# Altium PCB 跃贵LP2601.PcbDoc
Units mm, origin at the board's own origin, x right, y up, seen from the top; angles counter-clockwise.
Board outline 152.4 x 101.6 mm, 2 copper layers (Top Layer, Bottom Layer); 32 components, 0 nets, 82 pads, 0 vias.
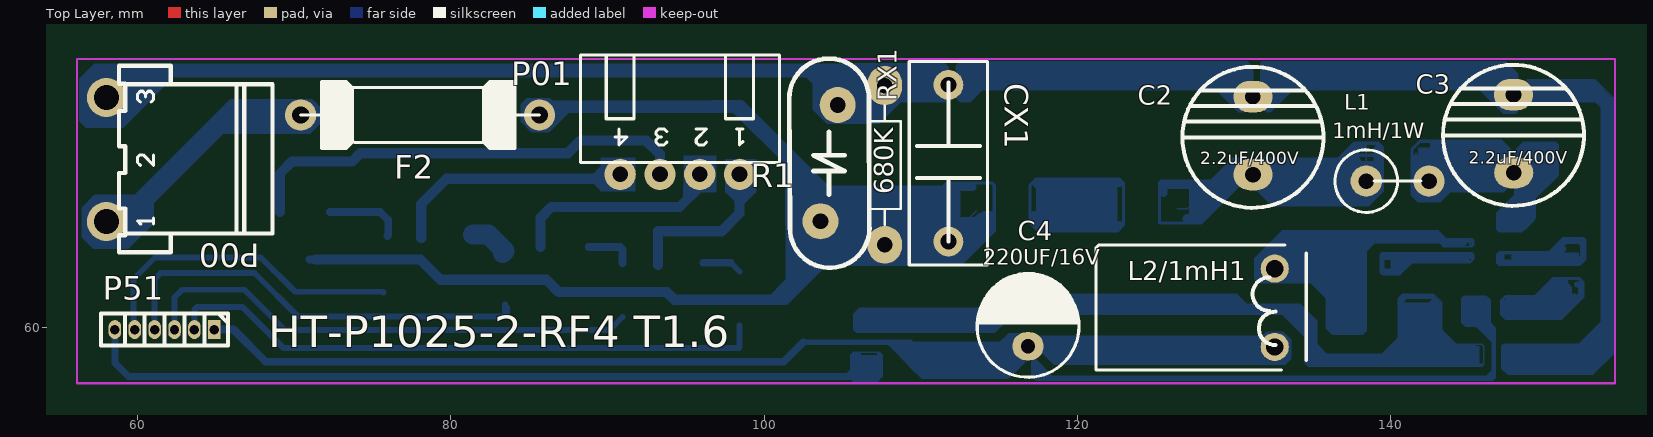
[diagram p0: Top Layer view]
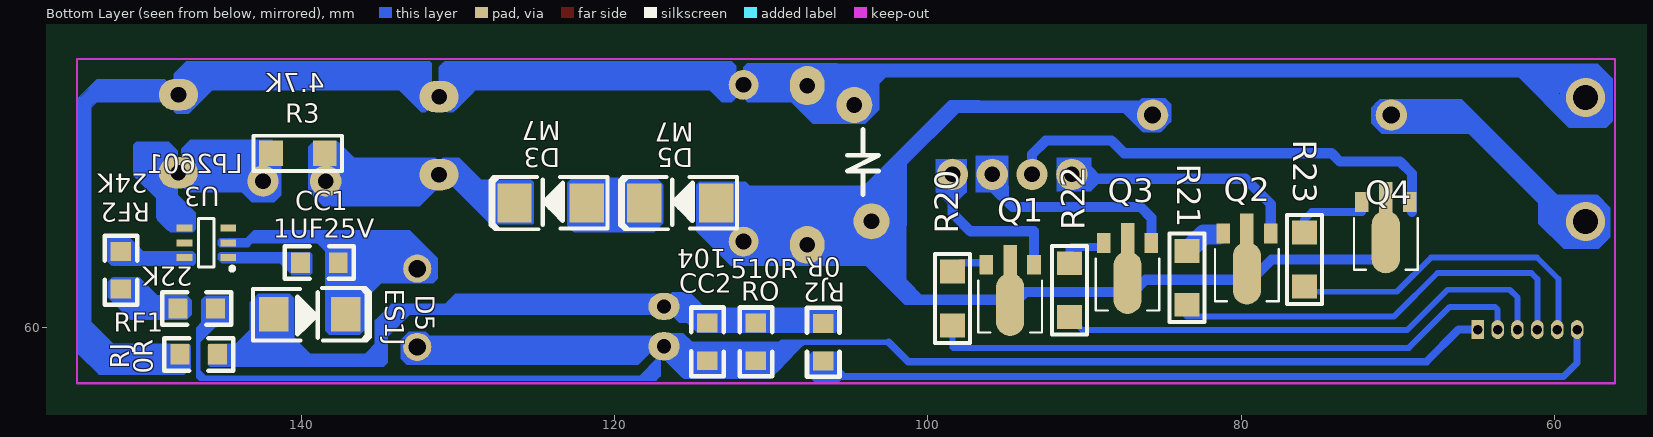
[diagram p1: Bottom Layer view, seen from below]

## Layer stack, top to bottom
Top Solder: solder mask 0.0102, Solder Resist, Dk 3.5
Top Layer: signal copper 0.0356
Dielectric 1: dielectric 0.32, FR-4, Dk 4.8
Bottom Layer: signal copper 0.0356
Bottom Solder: solder mask 0.0102, Solder Resist, Dk 3.5

## Board outline
25.4,25.4 177.8,25.4 177.8,127 25.4,127

## Design rules (kind name [scope] priority, off if disabled: settings)
Clearance [All] p1: gap=0.254 ignorepadtopadclearanceinfootprint=FALSE except(0: Arc-Hole Track-Hole SMDPad-Hole THPad-Hole Via-Hole Fill-Hole Poly-Hole Region-Hole Text-Hole)
PolygonConnect [All] p1: connectstyle=Relief reliefconductorwidth=0.254 reliefentries=4 polygonreliefangle="90 Angle" airgapwidth=0.254
RoutingVias [All] p1: holewidth=0.711 width=1.27 viastyle="Through Hole" minholewidth=0.711 minwidth=1.27 maxholewidth=0.711 maxwidth=1.27
SolderMaskExpansion [All] p1: expansion=0.102
Width [All] p1: maxlimit=0.254 minlimit=0.254 preferedwidth=0.254
30 further rules are at their usual default settings.

## Components (designator, comment, footprint, x,y, rotation, side; value= is the part's Value field where it differs from the comment)
C2 "2.2uF/400V" 4.7uF/400V大体 131.191,72.136 r180 top
C3 "2.2uF/400V" 4.7uF/400V大体 147.828,72.263 r180 top
C4 "220UF/16V" EC-220UF/16V/25V 116.84,60.071 r90 top
CC1 "1UF25V" R-0805 138.811,64.135 r0 bottom
CC2 "104" R-0805 114.071,59.055 r90 bottom
CX1 "" CX2-13*5-10 111.76,70.485 r90 top
D3 "M7" IN4007-SOP#1 124.079,67.945 r270 top
D5 "ES1J" IN4007-SOP#2 139.446,60.833 r90 top
D5 "M7" IN4007-SOP#1 115.81,67.945 r270 top
F2 "Fuse 1" FUSE15 78.029,73.558 r180 top
L1 "1mH/1W" RAD0.1 138.43,69.342 r90 top
L2/1mH1 "" 2.2MH/8*10 132.588,63.754 r270 top
P00 "220V~" VH-3AW 58.014,66.756 r90 top
P01 "风扇" XH-4AW 98.425,69.77 r180 top
P51 "Header 6" HDR1.27-M-LI-6P 61.722,59.864 r180 top
Q1 "HST97A8" SOT-89 93.218,64 r0 bottom
Q2 "HST97A8" SOT-89 78.105,66 r0 bottom
Q3 "HST97A8" SOT-89 85.725,65.4 r0 bottom
Q4 "HST97A8" SOT-89 69.24,68 r0 bottom
R1 "10D471" ZNR7.5 104.14,70.485 r270 top
R3 "Res2" "R 1206-HP_M" 140.208,71.12 r0 bottom
R20 "Res2" "R 1206-HP_M" 98.425,61.849 r90 bottom
R21 "Res2" "R 1206-HP_M" 83.439,63.166 r90 bottom
R22 "Res2" "R 1206-HP_M" 90.957,62.382 r90 bottom
R23 "Res2" "R 1206-HP_M" 75.946,64.338 r90 bottom
RF1 "0R" R-0805 146.558,58.293 r180 bottom
RF2 "24K" R-0805 151.511,63.627 r90 bottom
RJ "22K" R-0805 146.685,61.214 r180 bottom
RJ2 "0R" R-0805 106.68,59.03 r90 bottom
RO "510R" R-0805 110.973,59.055 r90 bottom
RX1 "680K" R10 107.696,65.278 r90 top
U3 "LP2601" SOT23-6L 146.05,65.405 r90 bottom

## Footprints (in the part's own frame and the unit in brackets; to place one, negate y for a bottom-side part, rotate by r counter-clockwise, add the part's x,y. Pads: shape width x height; smd on the part's side, far side on the other; paste and mask are expansions set on the pad)
2.2MH/8*10 [mm]
  round 1.8 hole 1.1: 1(0,0) 2(5,0)
  silkscreen extent -1.5,-11.4 6.48,2.01
4.7uF/400V大体 [mm]
  oval 2.5x2 hole 1: 1(-0.014,2.378) 2(-0.001,-2.595)
  silkscreen extent -4.5,-4.5 4.5,4.5
CX2-13*5-10 [mm]
  round 1.9 hole 1: 1(-5,0) 2(5,0)
  silkscreen extent -6.5,-2.5 6.5,2.5
EC-220UF/16V/25V [mm]
  oval 1.8x2 hole 0.9: 1(-1.27,0)
  oval 1.7x2 hole 0.9: 2(1.27,0)
  silkscreen extent -3.25,-3.25 3.25,3.25
FUSE15 [mm]
  round 2 hole 1.1: 1(7.62,0) 2(-7.62,0)
  silkscreen extent -7.62,-2.14 7.62,2.14
HDR1.27-M-LI-6P [mm] "直插，脚距：1.27mm                    @sucaita.com 素材塔"
  rect 0.8x1.2 hole 0.6: 1(-3.175,0)
  oval 0.8x1.2 hole 0.6: 2(-1.905,0) 3(-0.635,0) 4(0.635,0) 5(1.905,0) 6(3.175,0)
  silkscreen extent -4.06,-1.02 4.06,1.02, body extent -3.97,-0.9 3.98,0.9, height 4.5
IN4007-SOP#1 [mm]
  rect 2.5x2.2 smd far side: 1(0,-2.3) 2(0,2.3)
IN4007-SOP#2 [mm]
  rect 2.2x1.9 smd far side: 1(0,-2.3) 2(0,2.3)
R10 [mm]
  oval 2.4x2.2 hole 1: 1(0,0)
  oval 2.5x2.2 hole 1: 2(10.16,0)
  silkscreen extent 1.27,-1.02 8.89,1.02
"R 1206-HP_M" [mil] "1/4W高精度贴片电阻                    @sucaita.com 素材塔"
  rect 60x62.99 smd: 1(-67.5,0) 2(67.5,0)
  silkscreen extent -112,-44 112,44, body extent -63,-31 63,32, height 22
R-0805 [mm]
  rect 1.2x1.3 smd: 1(-1.175,0) 2(1.225,0)
  silkscreen extent -2.17,-1.05 2.22,1.03
RAD0.1 [mm]
  round 2 hole 1: 1(0,-4) 2(0,0)
  silkscreen extent -2,-3.5 2,2
SOT23-6L [mm] "3x1.6x1.1mm(长宽高)"
  rect 0.45x1 smd: "1 VCC"(-0.95,-1.397) "2  GND"(0,-1.397) "3 NC"(0.95,-1.397) "4 HV"(0.95,1.397) "6  FB"(-0.95,1.397) " 5 NC"(0,1.397)
  silkscreen extent -1.77,-1.78 1.55,0.51, body extent -1.5,-1.4 1.5,1.4, height 1.15
SOT-89 [mil]
  rect 34.02x50 smd: 1(0,0) 3(120,0)
  rect 34x100 smd: 2(60,0)
  oval 70.87x157.48 smd: 2(60,100)
  silkscreen extent -20,40 140,170, body extent -31,-17 151,151, height 63
VH-3AW [mm]
  round 2.5 hole 1.6: 1(0,0) 3(7.92,0)
  silkscreen extent -1.96,-10.6 9.96,-0.8
XH-4AW [mm]
  round 2 hole 1: 1(0,0) 2(2.54,0) 3(5.08,0) 4(7.62,0)
  silkscreen extent -2.54,-7.62 10.16,-0.76
ZNR7.5 [mm]
  round 2.3 hole 1: 1(-3.71,0.55) 2(3.71,-0.55)
  silkscreen extent -6.68,-2.54 6.68,2.58

## Part data
CX1: library part Cap, "Capacitor"
F2: "Fuse"
P00: library part "Header 2", "Header, 2-Pin"
P01: library part "Header 4", "Header, 4-Pin"
P51: "Header, 6-Pin"
Q1 Q2 Q3 Q4: library part Triac, "Silicon Bidirectional Triode Thyristor"
R1: library part "Res Varistor", "Varistor (Voltage-Sensitive Resistor)"
R3 R20 R21 R22 R23: "Resistor"

## Nets (pads, with @x,y where several pads share a name; then routed paths per layer and width w, separated by ;. In a path a pad name is that pad's centre, name@x,y a point inside that pad or via, vN(x,y) a via of type N, cw(c..) or ccw(c..) an arc to the next point about the centre after c; other vN are vias at no path point)
pads on no net: "U3.1 VCC" "U3.2  GND" "U3.3 NC" "U3.4 HV" "U3.6  FB" "U3. 5 NC" C2.1 C2.2 C3.1 C3.2 C4.1 C4.2 CC1.1 CC1.2 CC2.1 CC2.2 CX1.1 CX1.2 D3.1 D3.2 D5.1 D5.2 F2.1 F2.2 L1.1 L1.2 L2/1mH1.1 L2/1mH1.2 P00.1 P00.3 P01.1 P01.2 P01.3 P01.4 P51.1 P51.2 P51.3 P51.4 P51.5 P51.6 Q1.1 Q1.2 Q1.3 Q2.1 Q2.2 Q2.3 Q3.1 Q3.2 Q3.3 Q4.1 Q4.2 Q4.3 R1.1 R1.2 R3.1 R3.2 R20.1 R20.2 R21.1 R21.2 R22.1 R22.2 R23.1 R23.2 RF1.1 RF1.2 RF2.1 RF2.2 RJ2.1 RJ2.2 RJ.1 RJ.2 RO.1 RO.2 RX1.1 RX1.2
copper on no net: | length 1729
  Bottom Layer w0.1: 58.213,60.198 58.547,59.864 ; 102.235,76.454 103.124,75.565 103.124,73.914 104.013,73.025 107.315,73.025 108.712,74.422 111.506,74.422 111.76,74.676 111.76,76.581 111.506,76.835 105.791,76.835 ; 105.207,56.845 105.207,56.972 ; 105.397,57.061 105.486,56.972 105.258,56.972 ; 105.588,58.141 105.588,58.217 ; 105.664,56.871 105.664,56.566 ; 105.664,57.429 105.207,56.972 ; 105.664,57.988 105.664,58.369 105.842,58.191 105.842,58.217 105.994,58.369 106.02,58.369 ; 105.715,56.921 105.715,56.617 105.664,56.566 ; 105.715,57.277 105.512,57.277 ; 107.29,56.718 107.29,56.871 107.137,56.718 107.137,56.896 107.163,56.871 107.442,56.871 ; 107.391,58.318 107.34,58.268 ; 109.296,57.709 109.296,57.88 ; 110.871,60.071 111.125,59.817 114.605,59.817 116.078,61.29 116.078,61.697 115.341,60.96 112.014,60.96 ; 110.998,56.769 115.57,56.769 116.713,57.912 116.713,59.309 116.434,59.588 115.595,59.588 115.062,59.055 111.252,59.055 ; 111.481,59.055 109.296,59.055 109.296,57.531 110.058,56.769 112.039,56.769 ; 111.76,65.151 111.76,65.659 113.538,67.437 ; 111.887,58.166 115.697,58.166 115.824,58.293 ; 111.887,75.184 130.81,75.184 131.318,74.676 ; 116.713,62.103 129.921,62.103 130.175,62.103 130.81,61.468 134.239,61.468 135.255,60.452 ; 116.84,58.801 116.84,58.42 118.237,57.023 ; 116.84,61.214 117.221,60.833 132.842,60.833 ; 117.094,57.404 117.094,58.928 117.602,59.436 131.826,59.436 132.08,59.69 133.096,59.69 133.604,59.182 133.604,58.039 133.223,57.658 118.491,57.658 117.475,58.674 ; 117.094,58.547 117.094,56.896 117.348,56.642 146.177,56.642 146.533,56.998 146.533,59.284 146.304,59.512 146.304,60.833 146.05,61.087 ; 118.11,67.945 121.779,67.945 ; 118.491,58.293 132.461,58.293 ; 126.365,67.564 127,67.564 129.159,69.723 131.17,69.723 131.205,69.758 138.014,69.758 138.43,69.342 138.43,71.564 138.367,71.628 ; 129.413,60.833 133.096,60.833 134.493,59.436 134.493,57.785 ; 132.969,63.881 137.636,63.881 ; 134.493,57.912 134.62,57.912 134.747,57.785 134.493,57.785 ; 135.255,59.817 135.255,59.944 ; 135.255,60.325 135.128,60.325 135.255,60.198 ; 136.271,57.785 142.508,57.785 145.034,57.785 ; 137.146,60.833 137.89,61.577 137.89,63.627 137.636,63.881 ; 137.908,60.071 137.908,62.212 137.89,62.23 137.89,63.722 138.049,63.881 ; 139.909,64.516 139.97,64.455 144.653,64.455 ; 140.462,61.722 140.589,61.722 ; 140.716,61.976 140.843,62.103 ; 140.906,63.944 140.335,63.373 ; 141.605,71.12 141.605,70.358 142.621,69.342 ; 142.113,57.785 142.113,61.214 ; 142.24,69.723 147.066,69.723 147.193,69.596 ; 143.002,61.595 143.256,61.595 ; 143.256,61.341 143.256,61.595 ; 143.637,65.659 143.764,65.532 ; 144.082,65.596 143.954,65.596 143.891,65.659 ; 144.399,65.659 144.145,65.659 ; 144.551,61.824 144.755,61.824 144.653,61.722 144.653,61.697 144.653,61.976 ; 144.653,65.405 143.129,65.405 ; 144.729,60.274 144.653,60.198 ; 144.755,60.376 144.755,60.3 144.78,60.274 ; 144.755,61.874 144.653,61.976 ; 144.907,60.198 144.78,60.071 ; 144.907,61.976 146.05,61.976 146.304,61.722 146.304,60.198 146.177,60.071 144.78,60.071 ; 145.034,64.262 144.907,64.135 145.034,64.135 ; 145.097,65.215 145.288,65.405 145.161,65.405 145.288,65.532 ; 145.161,61.976 144.653,61.976 ; 145.161,64.516 145.161,64.262 145.034,64.135 ; 145.339,60.096 145.44,60.096 146.482,59.055 146.482,57.252 146.355,57.125 146.126,56.896 145.567,56.896 ; 145.517,56.693 145.644,56.82 146.609,56.82 146.609,59.969 146.304,60.274 146.304,61.062 ; 145.542,57.785 145.542,57.658 ; 145.567,60.249 145.567,60.325 145.567,60.173 146.558,59.182 146.609,59.182 ; 146.063,59.677 146.164,59.677 146.228,59.741 146.228,59.512 ; 146.813,74.858 152.853,74.858 153.416,74.295 153.416,60.071 ; 147.32,74.295 147.32,76.2 ; 147.447,57.277 147.447,57.023 ; 147.447,66.355 147.889,66.355 148.082,66.548 148.082,69.85 ; 147.647,74.676 147.829,74.858 ; 147.701,57.785 151.13,57.785 153.416,60.071 ; 147.701,64.516 151.638,64.516 ; 147.733,61.214 148.971,61.214 149.86,62.103 151.765,62.103 ; 148.336,74.858 148.772,74.422 153.035,74.422 153.416,74.041 153.416,60.325 ; 148.463,74.676 148.463,75.565 148.717,75.819 ; 148.971,75.565 148.717,75.565 ; 152.908,57.277 152.908,57.023 ; 105.207,56.972 105.258,56.972 ; 105.207,56.972 105.486,57.252 105.537,57.252 ; 105.207,56.972 105.512,57.277 ; 105.207,56.972 105.512,57.277 ; 105.258,56.972 105.385,57.099 105.689,57.099 105.677,57.112 105.397,57.112 105.512,56.998 105.537,56.998 105.537,57.252 ; 105.258,56.972 105.537,57.252 ; 105.512,57.277 105.537,57.252 ; 105.664,56.566 105.537,56.693 105.537,58.242 105.715,58.42 105.74,58.42 107.34,58.42 ; 105.664,56.566 107.213,56.566 ; 107.213,56.566 107.213,56.642 107.442,56.871 ; 107.213,56.566 107.518,56.871 ; 107.213,56.566 107.213,57.099 107.442,56.871 ; 107.213,56.566 107.518,56.871 ; 107.264,58.191 107.34,58.268 ; 107.264,58.191 107.264,58.344 ; 107.264,58.191 107.264,58.344 ; 107.264,58.344 107.34,58.42 ; 107.264,58.344 107.34,58.42 ; 107.34,58.268 107.34,58.242 107.442,58.141 107.442,58.318 107.34,58.42 ; 107.34,58.268 107.34,58.42 ; 107.34,58.42 107.518,58.242 107.518,56.871 ; 107.442,56.871 107.518,56.871 ; 134.493,57.785 134.747,57.531 145.796,57.531 ; 135.001,60.198 135.064,60.134 135.191,60.134 135.191,60.008 135.255,60.071 135.255,60.452 ; 135.001,60.198 135.255,60.452 ; 135.001,60.198 135.255,60.198 ; 135.001,60.198 135.255,60.198 ; 135.001,60.198 135.255,60.198 ; 135.001,60.198 135.255,59.944 ; 135.255,59.944 135.255,60.198 ; 135.255,59.944 135.128,60.071 135.255,60.198 ; 135.255,60.198 135.255,60.452 ; 135.255,60.198 135.255,60.452 ; 135.255,60.452 135.255,58.801 135.509,58.547 135.763,58.293 139.446,58.293 140.462,59.309 140.462,61.849 ; 137.636,63.881 137.636,65.246 138.303,65.913 142.621,65.913 143.129,65.405 ; 139.319,63.5 139.446,63.373 ; 139.319,63.5 139.446,63.5 ; 139.319,63.5 139.446,63.373 ; 139.319,63.5 139.319,64.643 ; 139.319,64.643 139.446,64.643 ; 139.319,64.643 139.446,64.516 ; 139.319,64.643 139.446,64.77 ; 139.319,64.643 139.446,64.516 ; 139.319,64.643 139.446,64.77 ; 139.446,63.373 139.446,63.5 ; 139.446,63.373 140.081,63.373 140.335,63.627 140.335,63.373 ; 139.446,63.373 139.827,63.373 ; 139.446,63.5 139.573,63.627 139.827,63.373 ; 139.446,64.516 139.573,64.516 ; 139.446,64.516 139.573,64.516 ; 139.446,64.643 139.573,64.516 ; 139.446,64.643 139.446,64.77 ; 139.446,64.77 145.161,64.77 145.288,64.643 145.288,64.389 145.034,64.135 ; 139.827,63.373 140.335,63.373 ; 139.827,63.373 140.589,63.373 ; 140.335,63.373 140.589,63.627 140.589,63.5 140.589,63.373 ; 140.462,61.595 140.589,61.722 ; 140.462,61.595 140.589,61.595 140.589,61.722 ; 140.462,61.595 140.462,61.849 ; 140.462,61.595 140.716,61.849 ; 140.462,61.849 140.589,61.722 ; 140.462,61.849 140.716,61.849 ; 140.462,61.849 140.716,62.103 ; 140.589,63.373 141.351,64.135 145.034,64.135 ; 140.716,61.849 140.843,61.976 140.843,62.103 ; 140.716,61.849 140.843,61.849 140.97,61.976 140.843,62.103 ; 140.716,61.849 140.716,62.103 ; 140.716,62.103 140.843,62.103 ; 140.716,62.103 142.748,62.103 143.256,61.595 ; 143.129,65.405 143.256,65.405 143.383,65.278 ; 143.129,65.405 143.51,65.405 143.383,65.278 ; 143.129,65.405 143.383,65.151 ; 143.129,65.405 143.129,65.532 ; 143.129,65.405 143.129,65.532 ; 143.129,65.405 143.002,65.405 143.129,65.532 ; 143.129,65.405 143.383,65.151 ; 143.129,65.405 138.938,65.405 138.43,64.897 138.43,59.817 138.176,59.563 136.271,59.563 135.89,59.944 135.89,61.849 134.874,62.865 131.572,62.865 131.318,63.119 131.318,64.389 133.096,66.167 143.002,66.167 143.51,65.659 ; 143.256,61.595 143.256,59.817 144.145,58.928 145.796,58.928 145.923,58.801 145.923,57.658 ; 143.383,65.151 143.637,65.151 143.891,65.405 ; 143.383,65.151 143.383,65.215 143.383,65.278 ; 143.383,65.151 143.383,65.278 ; 143.383,65.151 145.161,65.151 ; 143.51,65.659 143.637,65.532 143.764,65.532 ; 143.51,65.659 143.764,65.659 ; 143.51,65.659 144.653,65.659 145.161,65.659 145.288,65.532 ; 143.764,65.532 143.891,65.659 ; 143.764,65.532 143.764,65.659 ; 143.764,65.532 143.764,65.659 ; 143.764,65.532 143.764,65.659 ; 143.764,65.532 143.891,65.405 ; 143.891,65.405 144.145,65.659 ; 143.891,65.405 143.891,65.659 ; 143.891,65.405 144.145,65.659 ; 143.891,65.659 144.018,65.532 144.145,65.659 ; 144.526,60.325 144.729,60.325 144.653,60.249 144.653,60.198 ; 144.526,60.325 144.653,60.198 ; 144.526,60.325 144.526,61.849 144.653,61.976 ; 144.526,60.325 144.78,60.071 ; 144.653,60.198 144.755,60.198 144.78,60.173 144.78,60.274 ; 144.78,60.071 144.78,60.274 ; 144.78,60.071 144.78,60.274 ; 145.034,65.532 145.288,65.532 ; 145.034,65.532 145.034,65.278 145.161,65.151 ; 145.034,65.532 145.288,65.278 ; 145.161,65.151 145.288,65.278 ; 145.161,65.151 145.288,65.278 ; 145.288,65.278 145.288,65.532 ; 145.288,65.278 145.288,65.532 ; 145.288,65.278 145.288,65.532 ; 145.542,57.658 145.669,57.531 145.669,57.594 145.732,57.531 145.732,57.594 ; 145.542,57.658 145.923,57.658 ; 145.542,57.658 145.923,57.658 ; 145.732,57.594 145.796,57.658 145.923,57.658 ; 145.732,57.594 145.796,57.531 ; 145.796,57.531 145.923,57.658 ; 145.796,57.531 145.923,57.658 ; 147.447,57.023 147.574,57.023 147.574,57.15 ; 147.447,57.023 147.574,57.15 ; 147.447,57.023 147.701,57.277 147.828,57.277 147.701,57.15 147.701,57.023 147.574,57.15 ; 147.447,57.023 147.066,57.404 147.066,58.801 147.193,58.928 152.019,58.928 153.416,60.325 ; 147.447,57.023 152.908,57.023 ; 148.717,75.565 148.844,75.692 ; 148.717,75.565 148.717,75.819 ; 148.717,75.565 148.59,75.692 149.098,75.692 148.844,75.692 ; 148.717,75.819 148.844,75.692 ; 148.717,75.819 153.035,75.819 154.178,74.676 154.178,58.293 152.908,57.023 ; 153.416,60.071 153.416,60.325 ; 112.268,74.676 112.522,74.422 113.157,74.422 113.919,75.184 128.905,75.184 130.302,73.787 130.683,73.787 131.191,74.295 131.191,76.581 130.81,76.962 112.522,76.962 112.268,76.708 112.268,74.676 ; 131.699,74.168 132.08,73.787 132.334,73.787 133.731,75.184 145.669,75.184 147.193,73.66 147.955,73.66 148.082,73.787 148.082,76.2 147.32,76.962 131.826,76.962 131.699,76.835 131.699,74.168
  Bottom Layer w0.2: 57.836,68.275 59.741,68.275 65.938,74.473 71.12,74.473 71.603,73.99 71.603,73.05 70.993,72.441 65.43,72.441 60.935,67.945 60.935,66.65 59.385,65.1 57.201,65.1 56.515,65.786 56.515,67.615 57.302,68.402 59.919,68.402 ; 68.199,76.733 57.252,76.733 56.363,75.844 56.363,73.203 56.744,72.822 59.03,72.822 62.255,76.048 103.048,76.048 103.454,76.454 ; 100.101,61.544 101.448,61.544 104.521,64.618 104.521,65.176 ; 100.529,61.769 100.529,62.074 101.473,63.017 101.473,68.021 101.93,68.478 ; 100.863,62.103 101.854,62.103 103.759,64.008 112.522,64.008 114.681,66.167 114.681,69.088 114.554,69.215 111.633,69.215 111.379,68.961 104.013,68.961 102.362,68.961 ; 105.766,60.147 105.766,60.833 106.121,61.189 114.249,61.189 115.24,62.179 116.256,62.179 116.535,61.9 116.535,61.112 115.799,60.376 115.316,60.376 114.681,59.741 105.893,59.741 105.766,59.868 105.766,60.376 105.842,60.452 ; 118.237,69.469 122.682,69.469 122.936,69.215 122.936,66.548 122.555,66.167 117.475,66.167 116.967,66.675 116.967,69.088 117.348,69.469 118.872,69.469 ; 130.048,60.96 131.445,60.96 ; 136.652,70.739 137.668,71.755 139.192,71.755 139.446,71.501 139.446,69.215 ; 142.113,71.882 147.066,71.882 147.574,71.374 147.574,69.088 147.193,68.707 143.764,68.707 143.129,68.072 141.732,68.072 141.351,68.453 141.351,71.374 141.859,71.882 142.494,71.882 ; 145.288,57.658 145.415,57.658 145.542,57.785 ; 145.44,60.096 145.567,60.096 146.482,59.182 146.558,59.182 ; 145.517,56.693 146.482,56.693 146.609,56.82 146.609,59.614 146.533,59.69 ; 145.567,60.325 145.567,60.223 146.609,59.182 146.609,59.969 146.304,60.274 146.304,61.722 146.152,61.874 144.831,61.874 144.653,61.697 144.653,60.477 144.932,60.198 146.304,60.198 ; 146.533,57.252 146.05,56.769 145.796,56.769 146.304,56.769 ; 147.32,64.77 150.114,64.77 151.003,65.659 152.273,65.659 152.4,65.532 152.4,64.389 152.019,64.008 146.939,64.008 146.812,64.135 146.812,64.643 146.939,64.77 147.701,64.77 ; 147.447,61.976 149.225,61.976 150.368,63.119 152.019,63.119 152.273,62.865 152.273,61.976 150.876,60.579 147.32,60.579 147.066,60.833 147.066,61.722 147.32,61.976 147.701,61.976 ; 147.701,68.199 148.082,68.58 ; 149.225,75.692 149.098,75.692 148.971,75.565 ; 146.304,56.769 146.533,56.998 146.304,56.769 ; 148.971,75.565 148.717,75.565 148.971,75.565 ; 125.222,66.675 125.222,69.215 125.349,69.342 126.111,69.342 128.524,69.342 129.921,70.739 130.937,70.739 131.064,70.612 131.064,69.85 127.889,66.675 125.222,66.675 ; 131.445,68.834 132.461,67.818 138.557,67.818 139.446,68.707 139.446,70.612 139.065,70.993 137.668,70.993 137.414,70.739 131.445,70.739 131.445,68.834 ; 146.812,66.294 146.812,67.31 147.828,68.326 147.955,68.326 147.955,71.247 148.463,71.755 150.495,71.755 150.622,71.628 150.622,69.723 149.098,68.199 149.098,66.929 148.336,66.167 146.939,66.167 146.812,66.294
  Bottom Layer w0.3: 108.001,59.055 108.001,58.979 109.474,57.506 109.525,57.506 ; 108.179,59.055 108.229,59.055 109.347,57.937 ; 109.22,58.75 109.22,58.242 109.322,58.141 108.636,58.826 108.534,58.826 108.61,58.75 109.931,58.75 ; 109.525,57.963 109.525,57.506 ; 109.779,57.76 109.855,57.683 109.855,57.353 ; 110.312,56.921 110.109,56.921 109.525,57.506 ; 110.998,60.579 110.998,60.198 111.125,60.071 ; 114.071,59.969 114.351,59.969 ; 114.275,60.223 114.63,60.579 114.63,60.884 114.427,60.681 114.427,60.642 ; 114.96,56.896 115.57,56.896 116.586,57.912 116.586,58.268 ; 115.392,57.048 115.849,57.506 115.951,57.506 ; 115.519,59.08 115.24,59.08 115.011,58.852 115.646,59.487 116.002,59.487 ; 117.094,58.039 118.364,56.769 117.983,56.769 ; 117.348,57.785 117.221,57.658 117.221,57.531 ; 117.475,57.277 117.475,57.023 117.729,56.769 117.729,57.023 117.221,57.531 ; 117.729,58.674 117.856,58.674 ; 117.983,58.42 118.491,57.912 118.745,57.912 ; 117.983,58.547 117.856,58.674 ; 118.999,57.785 118.618,57.785 117.856,58.547 117.856,58.674 ; 131.699,59.182 131.826,59.182 132.207,59.563 133.096,59.563 133.477,59.182 133.477,58.166 133.223,57.912 ; 132.08,62.992 131.699,62.992 131.445,63.246 131.445,64.262 133.223,66.04 133.858,66.04 ; 132.334,64.516 132.334,64.77 133.35,65.786 ; 132.461,57.912 133.223,57.912 ; 133.223,57.785 133.223,57.912 ; 134.747,58.166 134.747,57.912 ; 134.747,63.246 136.017,61.976 136.017,60.071 136.398,59.69 138.049,59.69 138.303,59.944 ; 135.001,58.801 135.001,58.674 135.89,57.785 ; 135.001,59.055 135.89,58.166 136.271,58.166 ; 135.255,57.658 134.874,57.658 134.747,57.785 134.747,57.912 ; 135.89,62.738 136.017,62.865 136.017,63.119 136.144,62.992 136.144,62.484 135.636,62.992 135.255,62.992 136.144,62.103 136.525,62.103 ; 136.271,57.785 136.144,57.658 135.001,57.658 134.747,57.912 ; 140.081,64.516 139.573,64.516 139.446,64.389 139.446,63.754 139.573,63.627 140.589,63.627 141.224,64.262 141.224,64.389 ; 140.843,61.087 140.716,61.214 140.716,61.849 140.843,61.849 140.97,61.976 142.621,61.976 143.002,61.595 143.002,61.468 142.875,61.595 142.621,61.595 ; 143.256,65.659 143.51,65.405 144.272,65.405 ; 144.907,64.516 145.034,64.516 145.161,64.643 145.161,64.516 ; 144.907,65.532 145.034,65.532 ; 147.828,57.277 147.447,57.277 147.193,57.531 147.193,58.674 148.082,58.674 ; 152.019,58.547 152.019,58.674 153.67,60.325 153.797,60.325 ; 152.654,59.309 153.035,59.309 ; 152.781,75.692 152.908,75.692 154.051,74.549 154.051,74.422 153.924,74.422 153.035,75.311 ; 152.908,75.184 152.908,75.057 153.543,74.422 ; 153.134,74.577 153.543,74.168 153.67,74.168 ; 153.416,58.293 153.924,58.293 ; 153.543,59.436 153.416,59.309 153.035,59.309 ; 153.543,59.817 153.035,59.309 ; 154.051,58.42 152.908,57.277 ; 111.125,60.071 111.227,59.969 112.116,59.969 112.014,60.071 111.125,60.071 ; 117.221,57.531 117.221,57.023 117.475,56.769 117.983,56.769 ; 117.221,57.531 117.983,56.769 ; 152.908,57.277 152.527,57.277 152.908,57.277
  Bottom Layer w0.35: 118.364,56.769 145.796,56.769
  Bottom Layer w0.354: 86.487,73.279 87.274,74.066 ; 86.868,74.193 86.538,74.193 86.258,74.473 84.912,74.473 84.633,74.193 84.633,73.203 85.217,72.619 86.182,72.619 87.681,74.117 87.732,74.117 ; 88.697,69.52 89.027,69.52 ; 89.662,68.859 89.027,69.494 89.027,69.52 ; 89.662,70.155 89.027,69.52 ; 94.996,68.275 94.996,68.986 95.148,69.139 ; 97.853,64.135 98.425,63.563 ; 98.425,58.75 98.425,59.991 ; 98.501,68.047 98.654,68.047 99.314,68.707 99.314,68.885 ; 98.577,67.793 98.577,67.818 98.095,68.301 ; 98.628,68.834 98.933,68.529 98.933,68.478 ; 98.73,68.377 98.781,68.377 ; 102.641,59.055 104.419,59.055 109.296,59.055 110.947,57.404 111.074,57.404 ; 106.477,56.871 107.188,57.582 107.188,57.931 ; 107.188,60.331 111.652,60.331 111.887,60.566 ; 98.095,68.301 97.688,68.707 97.688,68.783 97.79,68.783 98.273,68.301 98.095,68.301
  Bottom Layer w0.38: 59.817,59.864 59.741,59.94 59.741,63.094 61.112,64.465 67.869,64.465 70.053,62.281 75.641,62.281 75.692,62.23 ; 61.087,59.864 61.087,62.56 61.087,63.094 61.468,63.475 67.462,63.475 70.231,60.706 73.838,60.706 83.439,60.706 83.566,60.833 83.566,61.265 ; 62.357,59.864 62.357,61.925 62.84,62.408 66.827,62.408 69.393,59.842 90.132,59.842 90.957,60.668 ; 63.627,59.864 63.627,61.138 63.805,61.316 66.675,61.316 69.291,58.699 98.374,58.699 98.425,58.75 98.425,60.134 ; 90.805,65.126 90.957,64.973 ; 102.489,59.055 102.641,59.055
  Bottom Layer w0.381: 61.087,59.864 61.087,61.769 ; 62.357,59.864 62.357,61.515 ; 63.627,59.864 63.627,60.639 ; 83.439,60.706 83.439,61.452
  Bottom Layer w0.4: 56.718,66.167 56.718,65.964 57.074,65.608 ; 56.82,66.751 56.82,67.615 57.429,68.224 57.531,68.224 ; 57.175,67.742 57.175,67.818 ; 57.201,65.38 57.201,66.04 ; 59.004,65.354 59.411,65.354 60.757,66.7 60.757,66.929 ; 59.004,67.361 60.046,67.361 65.405,72.72 66.65,72.72 ; 59.233,65.557 60.477,66.802 60.528,66.802 ; 59.842,67.97 59.842,68.123 65.938,74.219 66.294,74.219 ; 65.049,72.898 65.049,72.923 65.964,73.838 ; 65.583,72.898 65.659,72.974 65.659,73.508 66.065,73.101 66.065,72.949 ; 70.307,74.27 71.196,74.27 71.501,73.965 71.501,73.453 71.501,73.152 70.993,72.644 70.993,72.593 ; 102.21,66.065 102.21,69.19 102.235,69.215 ; 106.045,59.944 105.994,59.995 105.994,60.782 106.197,60.985 106.858,60.985 ; 114.427,60.681 114.427,61.036 115.291,61.9 116.205,61.9 116.205,60.935 115.913,60.642 115.252,60.642 114.681,60.071 114.529,60.071 114.529,60.223 114.96,60.655 ; 133.096,61.087 134.62,59.563 ; 133.604,60.833 133.858,60.833 134.747,59.944 135.001,59.944 135.001,60.452 134.239,61.214 133.604,61.214 ; 133.985,60.96 134.239,60.96 135.001,60.198 ; 137.795,64.643 137.922,64.643 138.811,65.532 ; 139.573,64.516 140.208,64.516 ; 142.621,65.913 143.002,65.913 143.51,65.405 ; 144.272,65.405 143.51,65.405 ; 144.653,65.405 143.891,65.405 143.51,65.405 ; 147.066,64.516 147.066,64.262 147.193,64.135 148.336,64.135 ; 147.193,61.595 147.193,60.96 147.32,60.833 147.701,60.833 ; 149.098,61.722 149.225,61.722 150.368,62.865 151.13,62.865 ; 149.86,61.849 149.86,62.103 150.368,62.611 151.257,62.611 ; 150.241,64.516 150.241,64.643 151.13,65.532 152.019,65.532 152.273,65.278 152.273,64.516 151.892,64.135 ; 150.749,64.516 150.749,64.77 151.003,65.024 ; 151.003,61.341 150.749,61.087 150.749,60.833 150.876,60.833 152.146,62.103 152.146,62.611 152.019,62.738 151.892,62.738 ; 151.638,61.722 151.638,61.976 ; 143.256,65.659 143.002,65.659 143.256,65.659 ; 143.256,65.659 143.51,65.405
  Bottom Layer w0.45: 58.547,59.864 58.547,57.734 59.411,56.871 106.477,56.871
  Bottom Layer w0.5: 56.591,74.244 56.591,73.355 56.871,73.076 ; 57.404,76.073 56.972,75.641 56.591,75.641 56.591,75.768 57.277,76.454 60.935,76.454 ; 57.531,68.224 59.385,68.224 ; 58.268,74.676 58.598,74.676 60.376,76.454 67.335,76.454 ; 58.649,73.127 58.852,73.127 62.128,76.403 62.382,76.403 ; 58.826,66.904 59.055,66.904 65.049,72.898 70.946,72.898 71.247,73.199 ; 59.182,74.371 59.487,74.371 61.468,76.352 61.798,76.352 ; 65.561,59.864 64.897,59.864 66.12,59.864 68.174,57.81 101.244,57.81 102.489,59.055 ; 70.968,64.334 71.124,64.334 ; 72.288,67.361 75.489,67.361 75.997,66.853 75.997,65.884 75.946,65.833 ; 88.798,65.126 90.805,65.126 ; 90.957,64.097 90.957,64.973 ; 96.114,64.135 97.853,64.135 ; 101.981,69.723 102.108,69.723 103.378,68.453 ; 102.235,62.738 102.235,62.865 103.632,64.262 ; 102.235,69.215 102.87,68.58 102.997,68.58 ; 102.362,63.5 102.997,64.135 ; 102.362,64.008 102.552,63.817 102.679,63.817 ; 102.743,76.454 102.743,76.327 103.378,75.692 103.378,74.041 104.14,73.279 107.188,73.279 108.712,74.803 108.839,74.676 111.379,74.676 111.506,74.803 111.506,76.454 ; 104.14,76.454 104.267,76.581 111.379,76.581 111.506,76.454 ; 111.506,75.946 111.506,76.454 ; 111.633,64.262 112.522,64.262 114.427,66.167 114.427,67.183 ; 111.76,68.961 113.284,68.961 ; 112.268,64.643 112.395,64.643 113.157,65.405 ; 112.649,75.057 113.157,75.057 ; 113.411,76.708 112.649,76.708 112.522,76.581 112.522,74.676 113.03,74.676 113.792,75.438 113.919,75.438 ; 113.792,67.056 113.665,66.929 113.665,65.913 114.046,66.294 114.046,67.183 ; 117.221,67.183 117.221,66.675 117.475,66.421 ; 117.348,69.215 117.729,68.834 ; 122.047,66.421 122.555,66.421 122.682,66.548 ; 122.174,69.215 122.682,69.215 ; 125.476,68.58 125.476,69.088 128.524,69.088 128.651,69.215 ; 129.159,75.946 129.159,75.184 130.302,74.041 130.683,74.041 130.937,74.295 130.937,76.581 130.81,76.708 130.683,76.708 ; 129.54,75.184 129.667,75.184 130.556,74.295 ; 129.794,61.849 130.048,61.849 130.683,61.214 131.318,61.214 130.048,61.214 129.921,61.087 ; 132.461,75.438 132.334,75.311 132.334,74.422 132.334,74.676 132.969,75.311 ; 132.715,76.708 131.953,76.708 131.953,74.168 132.08,74.041 132.207,74.041 133.604,75.438 ; 139.446,57.912 140.97,59.436 ; 142.875,59.817 143.002,59.817 144.399,58.42 144.399,58.293 ; 143.637,58.801 143.002,59.436 143.002,58.928 143.256,58.674 145.288,58.674 ; 145.669,75.565 147.32,73.914 147.828,73.914 147.828,76.073 147.193,76.708 147.066,76.708 ; 146.05,75.438 146.233,75.438 146.813,74.858 ; 147.511,76.391 147.574,76.327 147.574,73.914
  Bottom Layer w0.6: 127,66.929 127.762,66.929 130.302,69.469 130.302,69.723 ; 128.016,68.961 128.905,68.961 130.302,70.358 130.683,70.358 129.921,70.358 128.524,68.961 128.46,68.961 ; 128.905,68.58 129.921,69.596 ; 132.842,68.199 132.461,68.199 131.445,69.215 131.445,70.104 131.826,70.485 134.112,70.485 136.906,70.485 137.922,71.501 138.176,71.501 ; 137.668,70.993 137.668,70.739 137.795,70.612 ; 137.795,68.199 138.557,68.199 139.192,68.834 139.192,71.374 ; 141.605,70.739 141.605,68.707 141.859,68.453 143.129,68.453 143.637,68.961 147.066,68.961 147.193,69.088 ; 146.431,71.628 146.939,71.628 147.32,71.247 147.32,69.723 147.193,69.596 ; 147.889,66.355 147.005,66.355 147.005,67.122 148.717,68.834 148.717,68.961 ; 148.209,66.421 148.336,66.421 148.971,67.056 148.971,68.453 150.368,69.85 150.368,70.104 ; 148.336,68.453 148.336,69.342 148.209,69.469 148.209,71.12 148.59,71.501 150.368,71.501 ; 148.59,67.945 148.59,68.58
  Bottom Layer w0.65: 69.088,67.361 69.088,69.825 69.85,70.587 73.685,70.587 74.219,71.12 87.456,71.12 88.265,71.929 92.474,71.929 93.345,71.058 93.345,69.77 ; 71.374,64.338 74.32,64.338 78.038,64.338 79.333,63.043 86.106,63.043 86.893,62.255 93.786,62.255 94.272,61.769 100.529,61.769 100.863,62.103 ; 78.105,65.706 78.105,67.883 79.716,69.494 88.992,69.494 90.424,69.494 ; 85.725,65.151 85.725,67.005 86.411,67.691 92.631,67.691 94.59,67.691 95.885,68.986 95.885,69.77 ; 93.218,64 93.218,66.142 97.282,66.142 98.425,67.285 98.425,69.77 ; 96.774,74.193 98.501,74.193 104.902,67.793 104.902,67.64 ; 102.21,70.002 103.378,68.834 103.378,68.453
  Bottom Layer w0.8: 66.802,76.454 106.125,76.454 ; 86.487,74.088 98.189,74.088 101.727,70.55 101.727,66.595
  Bottom Layer w1: 101.473,62.23 101.219,61.976 101.219,62.23 102.006,63.017 102.006,66.954
  Bottom Layer w1.27: 81.407,65.938 82.381,65.938 83.439,64.881 83.312,64.754 ; 90.805,69.572 90.805,69.77 ; 104.14,65.579 110.019,65.579

## Keep-outs
Keep-Out Layer:
  lines w0.152: 56.134,56.435 154.305,56.435 154.305,77.136 56.134,77.136 56.134,56.435

## Other copper
Bottom Layer:
  rectangle: 105.537,58.141 105.664,58.242
  rectangle: 105.664,58.141 106.172,58.42
  rectangle: 105.689,56.566 107.213,57.099
  rectangle: 105.537,56.871 107.518,58.242
  rectangle: 109.322,57.531 110.566,58.141
  rectangle: 110.058,56.769 110.998,57.175
  rectangle: 109.779,56.972 110.693,57.76
  rectangle: 109.296,57.531 110.973,57.88
  rectangle: 109.296,57.937 110.947,59.004
  rectangle: 114.757,60.477 116.002,61.747
  rectangle: 106.121,59.741 114.681,61.189
  rectangle: 89.56,68.682 91.77,70.841
  rectangle: 94.844,68.605 96.952,70.968
  rectangle: 97.511,68.631 99.492,70.764
  rectangle: 57.302,67.183 60.909,68.402
  rectangle: 57.201,65.1 59.385,66.04
  rectangle: 56.515,65.786 60.122,66.65
  rectangle: 56.515,66.65 60.935,67.615
  rectangle: 65.938,72.441 70.993,74.473
  rectangle: 60.757,76.124 67.081,76.733
  rectangle: 56.718,72.822 59.03,73.66
  rectangle: 56.363,73.381 59.639,75.844
  rectangle: 57.125,74.955 61.189,76.606
  rectangle: 114.427,60.642 115.252,61.366
  rectangle: 115.595,59.055 116.611,59.588
  rectangle: 115.392,57.15 115.951,57.506
  rectangle: 115.392,57.506 116.383,58.115
  rectangle: 115.443,57.912 116.713,59.411
  rectangle: 110.617,56.769 115.57,59.055
  rectangle: 146.177,59.69 146.533,60.071
  rectangle: 146.177,59.36 146.609,59.842
  rectangle: 145.796,59.715 146.38,60.198
  rectangle: 144.526,60.274 146.304,61.849
  rectangle: 118.237,57.912 118.745,58.293
  rectangle: 117.475,59.055 118.745,59.436
  rectangle: 117.983,58.166 118.745,58.547
  rectangle: 117.729,58.42 118.999,59.182
  rectangle: 135.001,57.658 135.89,58.293
  rectangle: 131.064,60.833 134.239,61.468
  rectangle: 134.493,57.785 135.255,59.944
  rectangle: 135.763,57.531 140.272,58.293
  rectangle: 139.954,57.531 145.669,58.801
  rectangle: 140.462,57.531 143.256,61.595
  rectangle: 118.618,57.658 133.223,59.436
  rectangle: 117.348,60.833 130.175,62.103
  rectangle: 152.4,57.785 153.67,59.309
  rectangle: 147.701,57.023 152.908,57.785
  rectangle: 147.193,57.404 153.289,58.928
  rectangle: 153.416,58.293 154.178,74.549
  rectangle: 148.717,74.422 153.035,75.819
  rectangle: 132.461,64.77 133.731,65.405
  rectangle: 131.572,63.119 132.334,64.516
  rectangle: 139.319,63.5 139.446,63.627
  rectangle: 139.446,63.373 140.589,63.627
  rectangle: 143.383,65.151 144.272,65.405
  rectangle: 131.826,62.865 133.35,64.897
  rectangle: 136.017,59.817 138.43,63.373
  rectangle: 133.096,62.865 138.43,66.167
  rectangle: 138.176,65.405 143.002,66.167
  rectangle: 139.97,63.754 140.97,64.455
  rectangle: 140.081,64.135 145.034,64.77
  rectangle: 147.701,64.008 152.019,64.77
  rectangle: 149.86,61.277 151.575,62.611
  rectangle: 147.32,60.579 150.876,61.976
  rectangle: 147.447,66.802 148.971,68.072
  rectangle: 148.717,68.961 149.86,70.358
  rectangle: 148.209,68.199 149.098,70.358
  rectangle: 146.939,66.167 148.336,67.437
  rectangle: 148.336,69.723 150.622,71.628
  rectangle: 141.605,68.389 143.446,70.612
  rectangle: 142.494,71.12 147.066,71.882
  rectangle: 141.732,68.897 147.383,71.501
  rectangle: 127.127,67.183 128.397,67.818
  rectangle: 129.413,68.961 130.683,70.358
  rectangle: 127.127,67.818 129.032,69.088
  rectangle: 132.461,67.818 138.557,69.215
  rectangle: 131.953,68.58 139.319,70.612
  rectangle: 117.348,66.167 122.555,69.469
  rectangle: 111.76,65.278 113.792,67.056
  rectangle: 102.362,64.008 112.522,68.961
  rectangle: 131.826,75.184 147.32,76.962
  rectangle: 112.522,75.184 130.81,76.962
  rectangle: 103.759,73.279 107.569,74.041
  rectangle: 103.251,73.787 108.077,76.2
  rectangle: 103.759,74.549 111.633,76.708

## Silkscreen, mask and mechanical layers (free items; w line width, h text height)
Top Overlay:
  text "HT-P1025-2-RF4 T1.6" at 68.326,58.721 h2.03
Bottom Overlay:
  text "4.7K" at 138.481,75.006 h1.2
  text "LP2601" at 143.713,69.85 h1.2
Bottom Solder:
  drawing of 211 lines, arcs and shapes, not listed